# EAGLE board wateralarm (EAGLE 9.5.0)
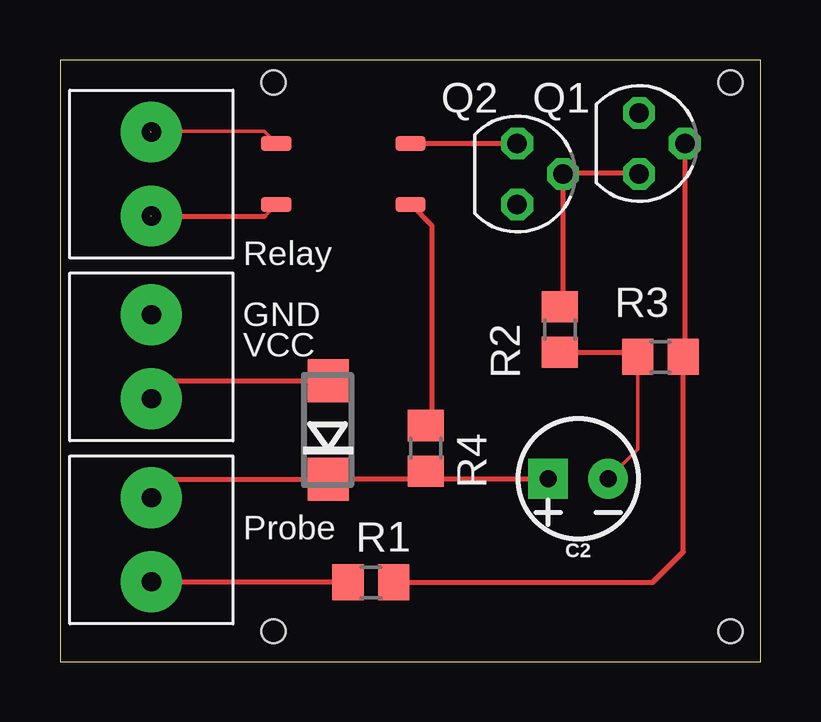
[diagram p0: board, top side]
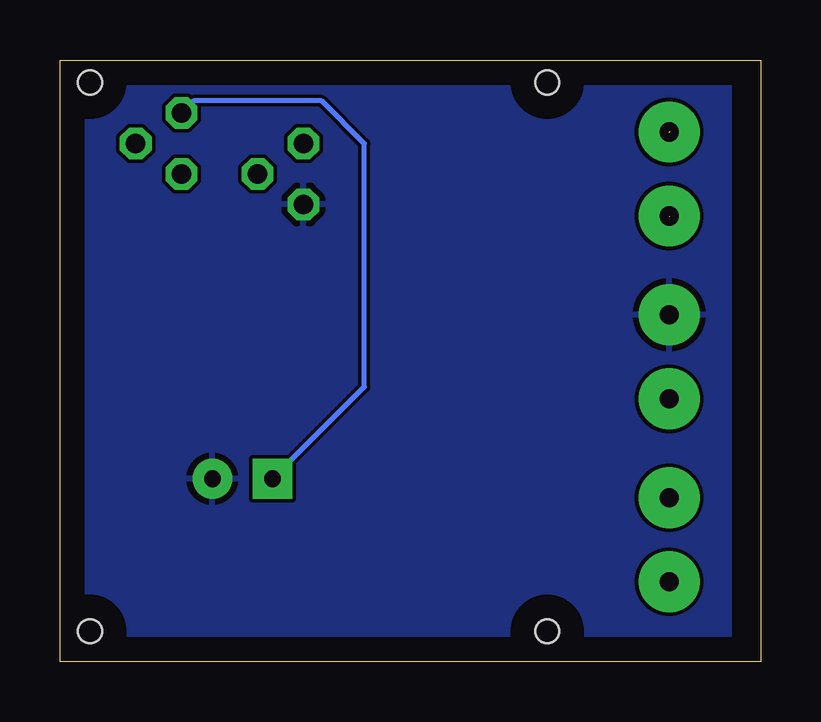
[diagram p1: board, bottom side, seen from below]

Size 29.19 x 25.07 mm. Coordinates in mm from the lower left corner, seen from the top.
Outline: 0,0 29.19,0 29.19,25.07 0,25.07 0,0
Copper layers (1*16): Top 0.035mm / dielectric 1.5mm / Bottom 0.035mm
Design rules "default": minimum track width 6mil, minimum drill 0.35mm, track to track 6mil, track to pad 6mil, pad to pad 6mil, via to via 6mil, smd to smd 6mil, copper to edge 40mil, drill to drill 6mil, minimum pad ring 10mil, minimum via ring 8mil, stop-mask expansion 4mil, vias tented up to drill 0mil, thermal gap 10mil
Holes 1 mm at 8.89,24.13 27.94,24.13 27.94,1.27 8.89,1.27

## Footprints (pad centres in the part's own frame; a part is rotated, then mirrored left to right if it is on the bottom)
CPOL-RADIAL-2.5MM-5MM = drill 0.7 pad 1.651 square: 1 1.25,0 | drill 0.7 pad 1.651: 2 -1.25,0
DO214AC = smd 1.8 x 1.7: A 2.05,0; C -2.05,0
SOT54A = drill 0.813 octagon: B 0,1.905; C -1.27,0; E 1.27,0
R0805 = smd 1.3 x 1.5: 1 -0.95,0; 2 0.95,0
SOP-4 = smd 0.635 x 1.27: PIN1 -1.27,-2.794; PIN2 1.27,-2.794; PIN3 1.27,2.794; PIN4 -1.27,2.794
KF350-2P = drill 0.8 pad 2.54: 1 -1.75,0; 2 1.75,0

## Placement (x,y rotation side)
C2  10uF  [CPOL-RADIAL-2.5MM-5MM]  21.59,7.62 180 top
D3  [DO214AC]  11.18,9.65 90 top
Q1  BC337  [SOT54A]  24.13,21.59 270 top
Q2  BC337  [SOT54A]  19.05,20.32 270 top
R1  [R0805]  12.95,3.3 0 top
R2  10K  [R0805]  20.83,13.84 90 top
R3  10k  [R0805]  25.02,12.7 0 top
R4  1K  [R0805]  15.24,8.89 270 top
U$1  OPTO-RELAY-CPC1017N  [SOP-4]  11.81,20.32 90 top
U$2  KF350-P2  [KF350-2P]  3.81,20.32 90 top
U$3  KF350-P2  [KF350-2P]  3.81,12.7 90 top
U$4  KF350-P2  [KF350-2P]  3.81,5.08 90 top

## Library data of the parts
C2 = SparkFun-Capacitors; PROD_ID: CAP-08440
D3 = diode
Q1 Q2 = transistor-small-signal
R1-R4 = resistor
U$1 = Feesta-partsu
U$2-U$4 = KF350-P2

## Nets
GND: C2.2 Q2.E R2.1 R3.1 U$3.2
N$1: Q1.B R1.2 R3.2
N$2: Q1.E Q2.B R2.2
N$3: Q2.C U$1.PIN2
N$4: R4.1 U$1.PIN1
N$5: R1.1 U$4.1
N$6: U$1.PIN4 U$2.1
N$7: U$1.PIN3 U$2.2
N$8: D3.A U$3.1
VCC: C2.1 D3.C Q1.C R4.2 U$4.2

## Tracks (layer width: path | path; a pad name or v marks a point on that pad's centre or on a via)
GND
  Top 0.152: R3.1 24.07,8.85 C2.2
  Top 0.203: 20.48,12.54 R2.1 23.88,12.89 R3.1 23.91,12.54
  pour Bottom: 1.27,25.4 29.21,25.4 29.21,0 1.27,0
N$1
  Top 0.152: 13.82,3.25 R1.2 13.92,3.3 | 25.86,21.59 Q1.B
  Top 0.203: Q1.B 26.04,12.77 R3.2 25.97,4.57 24.7,3.3 R1.2
N$2
  Top 0.152: 24.03,20.37 Q1.E | 21.03,20.37 Q2.B
  Top 0.203: 21.03,20.37 24.03,20.37 | Q2.B 20.96,14.92 R2.2
N$3
  Top 0.203: Q2.C U$1.PIN2
N$4
  Top 0.152: 14.61,19 U$1.PIN1 14.61,19.15
  Top 0.203: U$1.PIN1 15.49,18.16 15.49,10.09 R4.1
N$5
  Top 0.152: 11.99,3.4 R1.1
  Top 0.203: R1.1 3.81,3.3 U$4.1
N$6  (1 unrouted)
  Top 0.152: 8.97,19 U$1.PIN4 8.53,18.57
  Top 0.203: 3.78,18.57 8.53,18.57
N$7  (1 unrouted)
  Top 0.152: U$1.PIN3 8.51,22.1 3.77,22.1
N$8
  Top 0.203: U$3.1 4.56,11.7 D3.A
VCC
  Top 0.152: 24.03,22.81 Q1.C
  Top 0.203: U$4.2 4.58,7.6 D3.C 15.24,7.6 | 15.24,7.6 20.32,7.6 C2.1 | R4.2 15.24,7.6
  Bottom 0.203: Q1.C 23.62,23.37 18.29,23.37 16.51,21.59 16.51,11.45 C2.1

## Text on the board
tNames: Relay | GND | VCC | Probe